# Altium PCB sine.PcbDoc
Units mil, origin at the board's own origin, x right, y up, seen from the top; angles counter-clockwise.
Board outline 4015.75 x 2519.69 mil, 2 copper layers (Top Layer, Bottom Layer); 24 components, 21 nets, 76 pads, 0 vias.
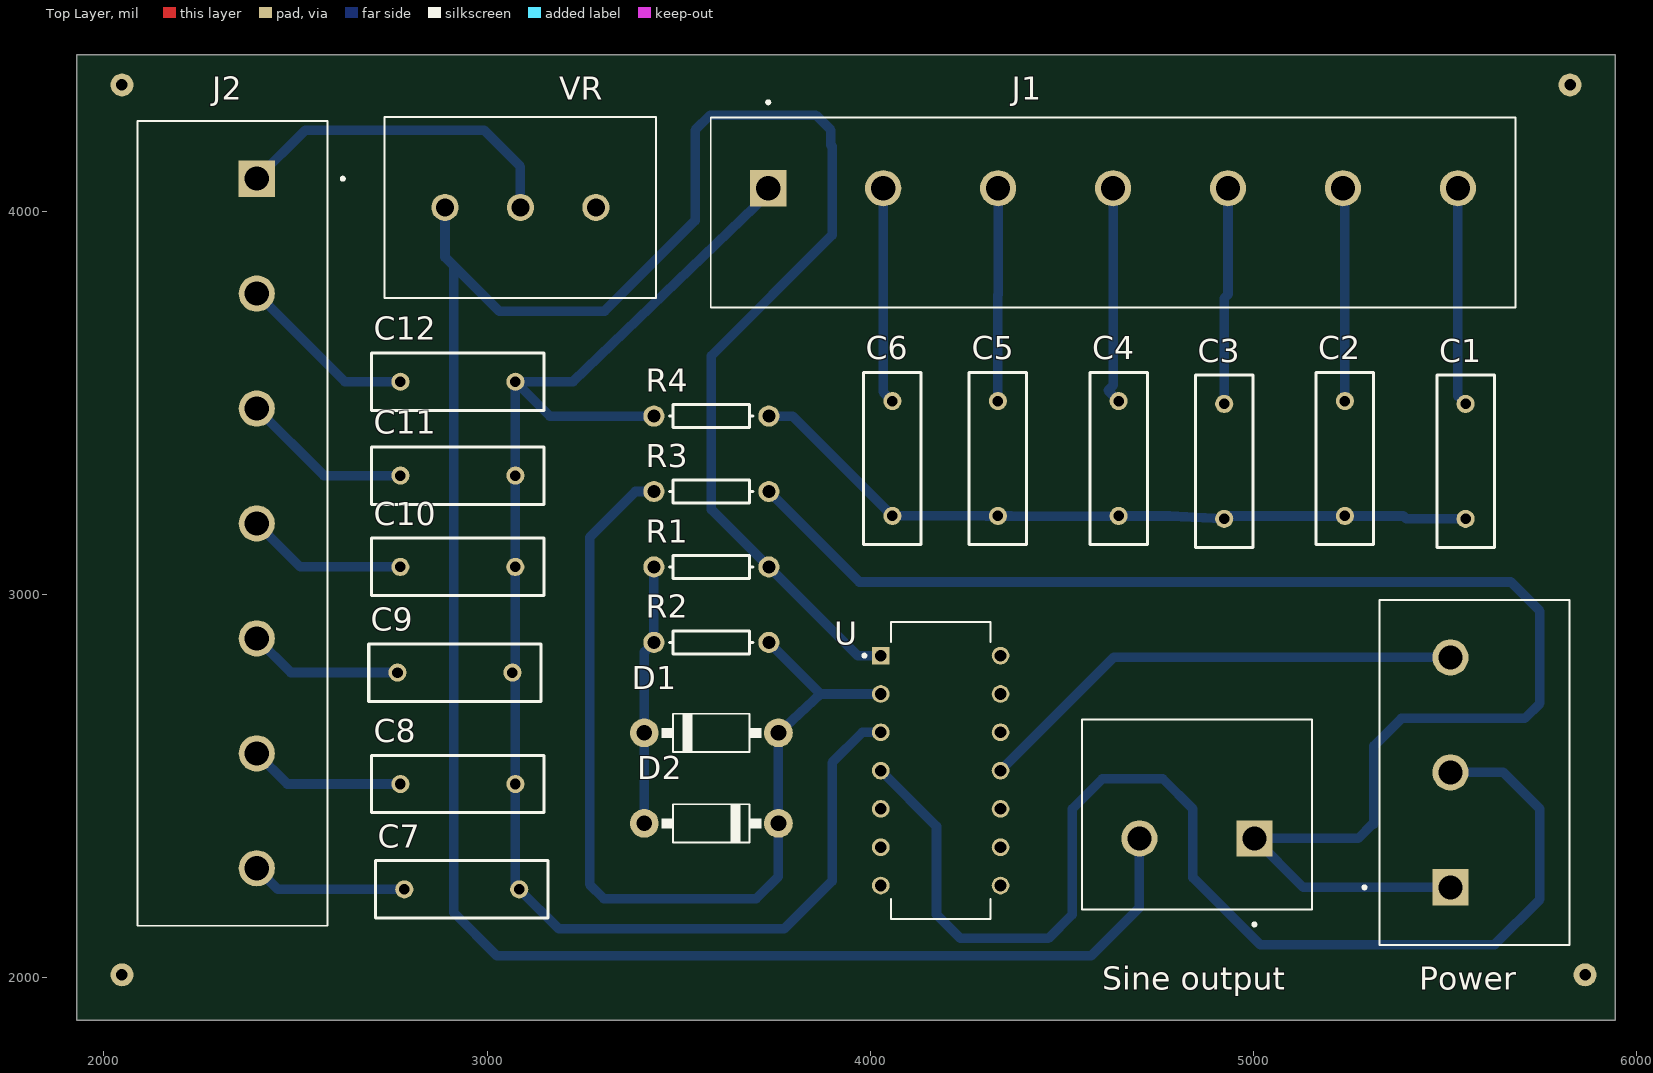
[diagram p0: Top Layer view]
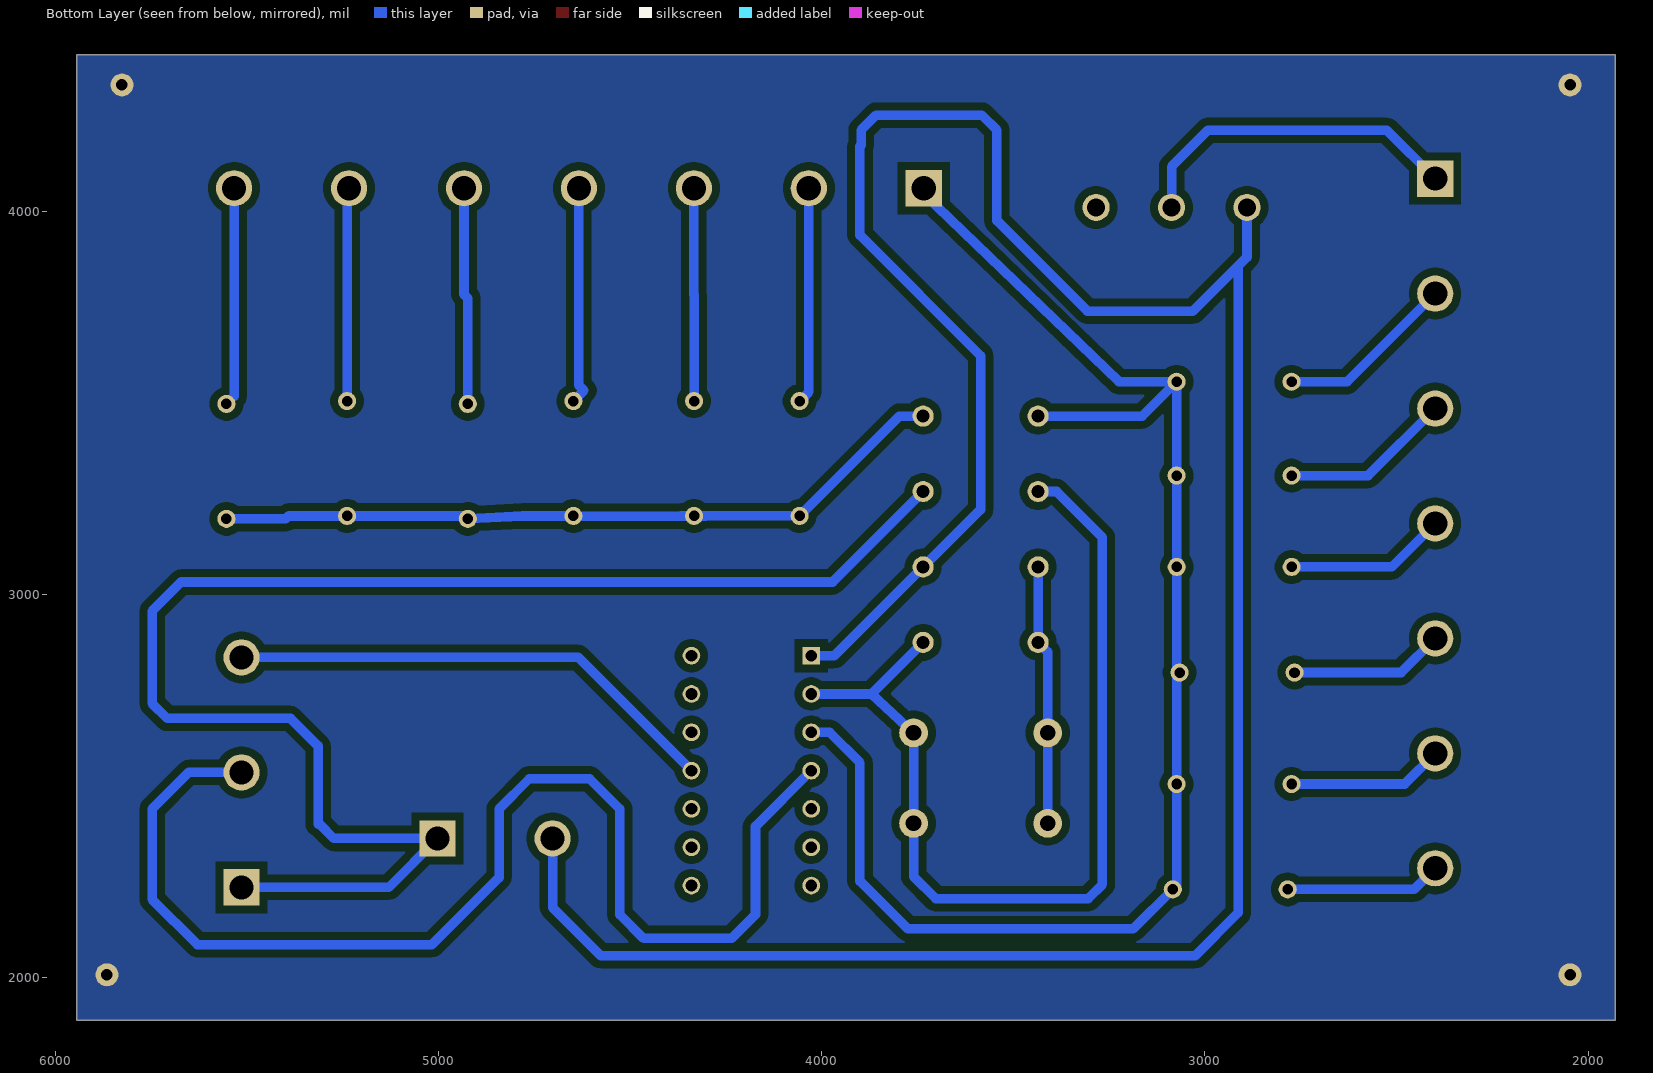
[diagram p1: Bottom Layer view, seen from below]

## Layer stack, top to bottom
Top Solder: solder mask 0.4, Solder Resist, Dk 3.5
Top Layer: signal copper 1.4
Dielectric 1: dielectric 12.6, FR-4, Dk 4.8
Bottom Layer: signal copper 1.4
Bottom Solder: solder mask 0.4, Solder Resist, Dk 3.5

## Board outline
1929.13,4409.45 5944.88,4409.45 5944.88,1889.76 1929.13,1889.76

## Design rules (kind name [scope] priority, off if disabled: settings)
Clearance [All] p1: gap=20 ignorepadtopadclearanceinfootprint=FALSE except(0: Arc-Hole Track-Hole SMDPad-Hole THPad-Hole Via-Hole Fill-Hole Poly-Hole Region-Hole Text-Hole)
PolygonConnect [All] p1: connectstyle=Relief reliefconductorwidth=10 reliefentries=4 polygonreliefangle="90 Angle" airgapwidth=10
RoutingLayers [All] p1: top layer_v5=FALSE bottom layer_v5=TRUE
RoutingVias [All] p1: holewidth=28 width=50 viastyle="Through Hole" minholewidth=28 minwidth=50 maxholewidth=28 maxwidth=50
SolderMaskExpansion [All] p1: expansion=4 istentingtop=FALSE
Width [All] p1: maxlimit=30 minlimit=10 preferedwidth=25 toplayer_maxwidth=10 toplayer_prefwidth=10 bottomlayer_minwidth=20 minimp=50.000000 maximp=50.000000 favimp=50.000000
29 further rules are at their usual default settings.

## Components (designator, comment, footprint, x,y, rotation, side; value= is the part's Value field where it differs from the comment)
C1 "Cap" RAD-0.3 5554.12,3348.09 r270 top value=2.2nF
C2 "Cap" RAD-0.3 5239.16,3355.57 r270 top value=6.8nF
C3 "Cap" RAD-0.3 4924.2,3348.09 r270 top value=22nF
C4 "Cap" RAD-0.3 4648.6,3355.57 r270 top value=0.068uF
C5 "Cap" RAD-0.3 4333.64,3355.57 r270 top value=0.22uF
C6 "Cap" RAD-0.3 4058.05,3355.57 r270 top value=0.68uF
C7 "Cap" RAD-0.3 2934.08,2230.97 r0 top value=2.2nF
C8 "Cap" RAD-0.3 2924.08,2505.97 r0 top value=6.8nF
C9 "Cap" RAD-0.3 2916.32,2796.91 r0 top value=22nF
C10 "Cap" RAD-0.3 2923.8,3072.5 r0 top value=0.068uF
C11 "Cap" RAD-0.3 2924.08,3310.97 r0 top value=0.22uF
C12 "Cap" RAD-0.3 2924.08,3555.97 r0 top value=0.68uF
D1 "DIP-DIODE-50V-1A(DO-41)" DO-41 3585.61,2639.43 r180 top
D2 "DIP-DIODE-50V-1A(DO-41)" DO-41 3585.61,2403.21 r0 top
J1 "TB005-762-07BE" CUI_TB005-762-07BE 3734.08,4060.97 r0 top
J2 "TB005-762-07BE" CUI_TB005-762-07BE 2399.08,4085.97 r270 top
Power "TB005-762-03BE" CUI_TB005-762-03BE 5514.75,2236.28 r90 top
R1 "Res1" AXIAL-0.3 3585.61,3072.5 r0 top value=5K
R2 "Res1" AXIAL-0.3 3585.61,2875.65 r180 top value=6.8K
R3 "Res1" AXIAL-0.3 3585.61,3269.35 r0 top value=5K
R4 "Res1" AXIAL-0.3 3585.61,3466.2 r180 top value=10K
"Sine output" "TB005-762-02BE" CUI_TB005-762-02BE 5002.94,2363.84 r180 top
U "TL074CN" DIP794W45P254L1969H508Q14 4184.08,2540.97 r0 top
VR "P160KN-0QC15B500K" P160 3087.23,4010.97 r0 top

## Footprints (in the part's own frame and the unit in brackets; to place one, negate y for a bottom-side part, rotate by r counter-clockwise, add the part's x,y. Pads: shape width x height; smd on the part's side, far side on the other; paste and mask are expansions set on the pad)
AXIAL-0.3 [mm] "Axial Device, Thru-Hole; 2 Leads; 0.3 in Pin Spacing"
  round 1.4 hole 0.85: 1(-3.81,0) 2(3.81,0)
  silkscreen extent -2.77,-0.76 2.77,0.76
CUI_TB005-762-02BE [mm]
  rect 2.4x2.4 hole 1.6: 1(0,0)
  round 2.4 hole 1.6: 2(7.62,0)
  silkscreen extent -3.81,-7.9 11.43,5.8
CUI_TB005-762-03BE [mm]
  rect 2.4x2.4 hole 1.6: 1(0,0)
  round 2.4 hole 1.6: 2(7.62,0) 3(15.24,0)
  silkscreen extent -3.81,-7.9 19.05,5.8
CUI_TB005-762-07BE [mm]
  rect 2.4x2.4 hole 1.6: 1(0,0)
  round 2.4 hole 1.6: 2(7.62,0) 3(15.24,0) 4(22.86,0) 5(30.48,0) 6(38.1,0) 7(45.72,0)
  silkscreen extent -3.81,-7.9 49.53,5.8
DIP794W45P254L1969H508Q14 [mm]
  rect 1.17x1.17 hole 0.77: 1(-3.97,7.62)
  round 1.17 hole 0.77: 2(-3.97,5.08) 3(-3.97,2.54) 4(-3.97,0) 5(-3.97,-2.54) 6(-3.97,-5.08) 7(-3.97,-7.62) 8(3.97,-7.62) 9(3.97,-5.08) 10(3.97,-2.54) 11(3.97,0) 12(3.97,2.54) 13(3.97,5.08) 14(3.97,7.62)
  silkscreen extent -5.15,-9.84 3.3,9.85
DO-41 [mil]
  round 75 hole 41: 1(-175,0) 2(175,0)
  silkscreen extent -130,-50 130,50
P160 [mm]
  round 1.8 hole 1.2: 1(-5,0) 2(0,0) 3(5,0)
  silkscreen extent -9,-6 9,6
RAD-0.3 [mm] "Radial Cap, Thru-Hole; 2 Leads; 0.3 in Pin Spacing"
  round 1.2 hole 0.7: 1(-3.81,0) 2(3.81,0)
  silkscreen extent -5.71,-1.91 5.72,1.9

## Part data
C1 C2 C3 C4 C5 C6 C7 C8 C9 C10 C11 C12: "Capacitor", LatestRevisionDate=17-Jul-2002, LatestRevisionNote="Re-released for DXP Platform.", PackageDescription="Radial Cap, Thru-Hole; 2 Leads; 0.3 in Pin Spacing", PackageReference=RAD-0.3, Published=8-Jun-2000, Publisher="Altium Limited"
D1 D2: "Diode Standard 50V 1A Through Hole DO-41", Package="DO-41 Comchip", Availability=Unavailable, MF="Comchip Technology", MP=1N4001-G, Price=None, SnapEDA_Link=https://www.snapeda.com/parts/1N4001-G/Comchip%20Technology/view-part/106354/?ref=snap
J1 J2: "2~24 Poles, Screw Type, Horizontal, 7.62 Pitch, 26~10 (AWG), Terminal Block Connector", Package=None, Availability=Unavailable, Check_prices=https://www.snapeda.com/parts/TB005-762-07BE/CUI%20Devices/view-part/3591007/?ref=eda, CUI_purchase_URL=https://www.cuidevices.com/product/interconnect/connectors/terminal-blocks/tb005-762-series?utm_source=snapeda.com&utm_medium=referral&utm_campaign=snapedaBOM, MF="CUI Devices", MP=TB005-762-07BE, Price=None, SnapEDA_Link=https://www.snapeda.com/parts/TB005-762-07BE/CUI%20Devices/view-part/3591007/?ref=snap
Power "Sine output": "2~24 Poles, Screw Type, Horizontal, 7.62 Pitch, 26~10 _AWG_, Terminal Block Connector", Package=None, Availability=Unavailable, MF="CUI Devices", Price=None
  Power: CUI_purchase_URL=https://www.cuidevices.com/product/interconnect/connectors/terminal-blocks/tb005-762-series?utm_source=snapeda.com&utm_medium=referral&utm_campaign=snapedaBOM, MP=TB005-762-03BE, SnapEDA_Link=https://www.snapeda.com/parts/TB005-762-03BE/CUI%20Devices/view-part/3590987/?ref=snap
  "Sine output": MP=TB005-762-02BE, SnapEDA_Link=https://www.snapeda.com/parts/TB005-762-02BE/CUI%20Devices/view-part/3590982/?ref=snap
R1 R2 R3 R4: "Resistor", LatestRevisionDate=17-Jul-2002, LatestRevisionNote="Re-released for DXP Platform.", PackageDescription="Axial Device, Thru-Hole; 2 Leads; 0.3 in Pin Spacing", PackageReference=AXIAL-0.3, Published=8-Jun-2000, Publisher="Altium Limited"
U: "Quad Low-Noise JFET-Input General-Purpose Operational Amplifier 14-PDIP 0 to 70", Package="PDIP-14 Texas Instruments", Availability=Good, DigiKey-Purchase-URL=https://snapeda.com/shop?store=DigiKey&id=4796371, MF="Texas Instruments", Mouser-Purchase-URL=https://snapeda.com/shop?store=Mouser&id=4796371, MP=TL074CN, Price=None, SnapEDA_Link=https://www.snapeda.com/parts/TL074CN/Texas%20Instruments/view-part/4796371/?ref=snap, Texas_Instruments-Purchase-URL=https://snapeda.com/shop?store=Texas+Instruments&id=4796371
VR: "500k Ohm 1 Gang Linear Panel Mount Potentiometer None 1 Turn Conductive Plastic 0.2W, 1/5W PC Pins", Package=None, Digi-Key_Part_Number=987-1304-ND, Digi-Key_Purchase_URL=https://www.digikey.cz/product-detail/en/tt-electronics-bi/P160KN-0QC15B500K/987-1304-ND/2408881?utm_source=snapeda&utm_medium=aggregator&utm_campaign=symbol, MF="TT Electronics/BI", MP=P160KN-0QC15B500K, SnapEDA_Link=https://www.snapeda.com/parts/P160KN-0QC15B500K/TT%20Electronics/BI/view-part/903272/?ref=snap

## Free pads (board coordinates)
  round 60 hole 30: 10(2047.24,4330.71) 11(5826.77,4330.71) 12(5866.14,2007.87) 13(2047.24,2007.87)

## Nets (pads, with @x,y where several pads share a name; then routed paths per layer and width w, separated by ;. In a path a pad name is that pad's centre, name@x,y a point inside that pad or via, vN(x,y) a via of type N, cw(c..) or ccw(c..) an arc to the next point about the centre after c; other vN are vias at no path point)
NetC1_1: C1.1 J1.7 | length 571.2
  Bottom Layer w25: J1.7 5534.08,3518.13 C1.1
NetC1_2: C1.2 C2.2 C3.2 C4.2 C5.2 C6.2 R4.1 | length 1938.1
  Bottom Layer w25: R4.1 3797.42,3466.21 C6.2 4058.49,3206.01 4303.01,3206.01 4303.44,3205.57 C5.2 4368.68,3205.57 4369.25,3205.01 4648.04,3205.01 C4.2 4782.01,3205.57 C3.2 4924.2,3205.57 C2.2 5392.01,3205.57 5399.49,3198.09 C1.2
NetC2_1: C2.1 J1.6 | length 557.5
  Bottom Layer w25: J1.6 5239.16,4055.89 C2.1
NetC3_1: C3.1 J1.5 | length 567
  Bottom Layer w25: C3.1 4924.2,3774.01 4934.08,3783.89 J1.5
NetC4_1: C4.1 J1.4 | length 572.2
  Bottom Layer w25: J1.4 4634.08,3546.24 4621.01,3533.17 C4.1
NetC5_1: C5.1 J1.3 | length 555.6
  Bottom Layer w25: C5.1 4333.64,3783.01 4334.08,3783.44 J1.3
NetC6_1: C6.1 J1.2 | length 565.3
  Bottom Layer w25: J1.2 4034.08,3529.55 C6.1
NetC7_1: C7.1 J2.7 | length 407.8
  Bottom Layer w25: J2.7 2454.08,2230.97 C7.1
NetC7_2: C7.2 C8.2 C9.2 C10.2 C11.2 C12.2 J1.1 R4.2 U.3 | length 3988.2
  Bottom Layer w25: C9.2 C9.2@3073.8,2796.91 ; R4.2 3163.84,3466.21 C12.2 ; J1.1 3733.79,4046.05 3224.69,3555.97 C12.2 ; U.3 3979.55,2640.97 3900.57,2561.99 3900.57,2252.58 3775.62,2127.62 3187.42,2127.62 C7.2 3074.08,2240.97 C8.2 3074.08,2780.97 3073.8,2781.24 C9.2@3073.8,2796.91 ; C9.2@3073.8,2796.91 C10.2 3074.08,3072.78 C11.2 C12.2
NetC8_1: C8.1 J2.6 | length 408.1
  Bottom Layer w25: J2.6 2479.08,2505.97 C8.1
NetC9_1: C9.1 J2.5 | length 404.1
  Bottom Layer w25: J2.5 2488.13,2796.91 C9.1
NetC10_1: C10.1 J2.4 | length 421.7
  Bottom Layer w25: J2.4 2512.54,3072.5 C10.1
NetC11_1: C11.1 J2.3 | length 447.5
  Bottom Layer w25: J2.3 2574.08,3310.97 C11.1
NetC12_1: C12.1 J2.2 | length 470.3
  Bottom Layer w25: J2.2 2629.08,3555.97 C12.1
NetD1_1: D1.1 D2.2 R2.1 R3.1 U.2 | length 2527.9
  Bottom Layer w25: R3.1 3387.47,3269.36 3267.72,3149.61 3267.72,2244.09 3305.45,2206.36 3702.43,2206.36 3760.61,2264.55 D2.2 D1.1 3870.3,2740.97 ; R2.1 3870.3,2740.97 ; U.2 3870.3,2740.97
NetD1_2: D1.2 D2.1 R1.1 R2.2 | length 679.6
  Bottom Layer w25: D2.1 D1.2 3410.61,2850.65 R2.2 R1.1
NetJ2_1: J2.1 VR.2 | length 886.5
  Bottom Layer w25: J2.1 2525.71,4212.6 2992.13,4212.6 3087.23,4117.5 VR.2
NetPower_1: "Sine output.1" Power.1 R3.2 | length 3957.7
  Bottom Layer w25: R3.2 3971.84,3033.13 5672.23,3033.13 5748.03,2957.33 5748.03,2716.54 5708.66,2677.17 5386.77,2677.17 5314.96,2605.36 5314.96,2401.57 5311.69,2401.57 5273.95,2363.84 5002.94,2363.84 5130.49,2236.28 Power.1
NetPower_2: Power.2 U.4 | length 3212.7
  Bottom Layer w25: U.4 4173.23,2395.52 4173.23,2165.35 4235.57,2103.01 4465.21,2103.01 4527.56,2165.35 4527.56,2440.94 4606.3,2519.68 4763.78,2519.68 4842.52,2440.94 4842.52,2261.96 5017.87,2086.61 5629.92,2086.61 5748.03,2204.72 5748.03,2440.94 5652.69,2536.28 Power.2
NetPower_3: Power.3 U.11 | length 1296.7
  Bottom Layer w25: U.11 4635.69,2836.28 Power.3
NetR1_2: "Sine output.2" R1.2 U.1 VR.1 | length 7063.9
  Bottom Layer w25: VR.1@2874.02,3994.61 VR.1 2890.38,3881.28 2913.39,3858.27 ; U.1 3967.15,2840.97 R1.2 3585.61,3222.5 3585.61,3623.68 3900.57,3938.65 3900.57,4170.29 3897.64,4173.23 3897.64,4212.6 3858.27,4251.97 3582.68,4251.97 3543.31,4212.6 3543.31,3976.38 3307.09,3740.16 3031.5,3740.16 2913.39,3858.27 ; 4702.94,2363.84 4702.94,2183.25 4577.69,2058.01 3025.31,2058.01 2913.39,2169.93 2913.39,3858.27
pads on no net: U.5 U.6 U.7 U.8 U.9 U.10 U.12 U.13 U.14 VR.3

## Polygon pours and split planes (outlines as drawn)
no net on Bottom Layer "NONET_L02_P000" (solid, pour order 0): 1929.13,4409.45 5944.88,4409.45 5944.88,1889.76 1929.13,1889.76

## Silkscreen, mask and mechanical layers (free items; w line width, h text height)
board outline:
  the board outline again, w39.37